# Altium PCB 最小系统板排针位置(1).PcbDoc
Units mm, origin at the board's own origin, x right, y up, seen from the top; angles counter-clockwise.
Board outline 80.1 x 50.12 mm, 2 copper layers (Top Layer, Bottom Layer); 8 components, 142 nets, 118 pads, 0 vias.
Unrouted connection lines stored in the file: 6.
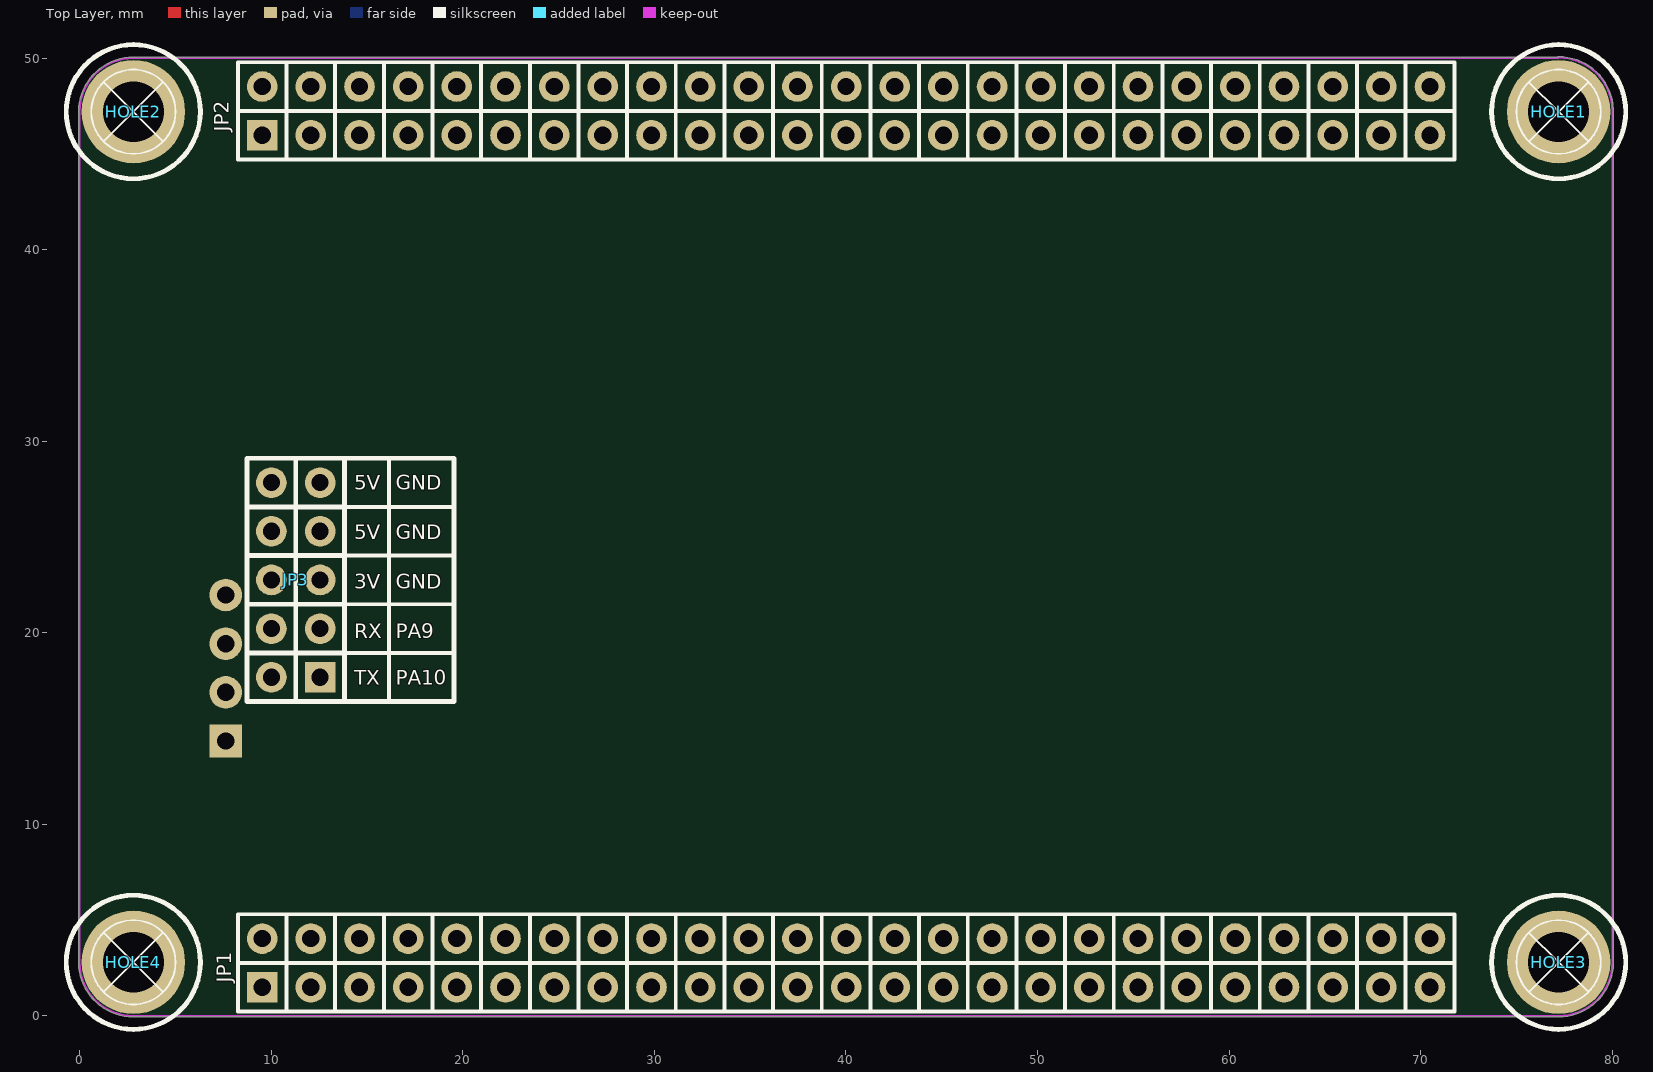
[diagram p0: Top Layer view]
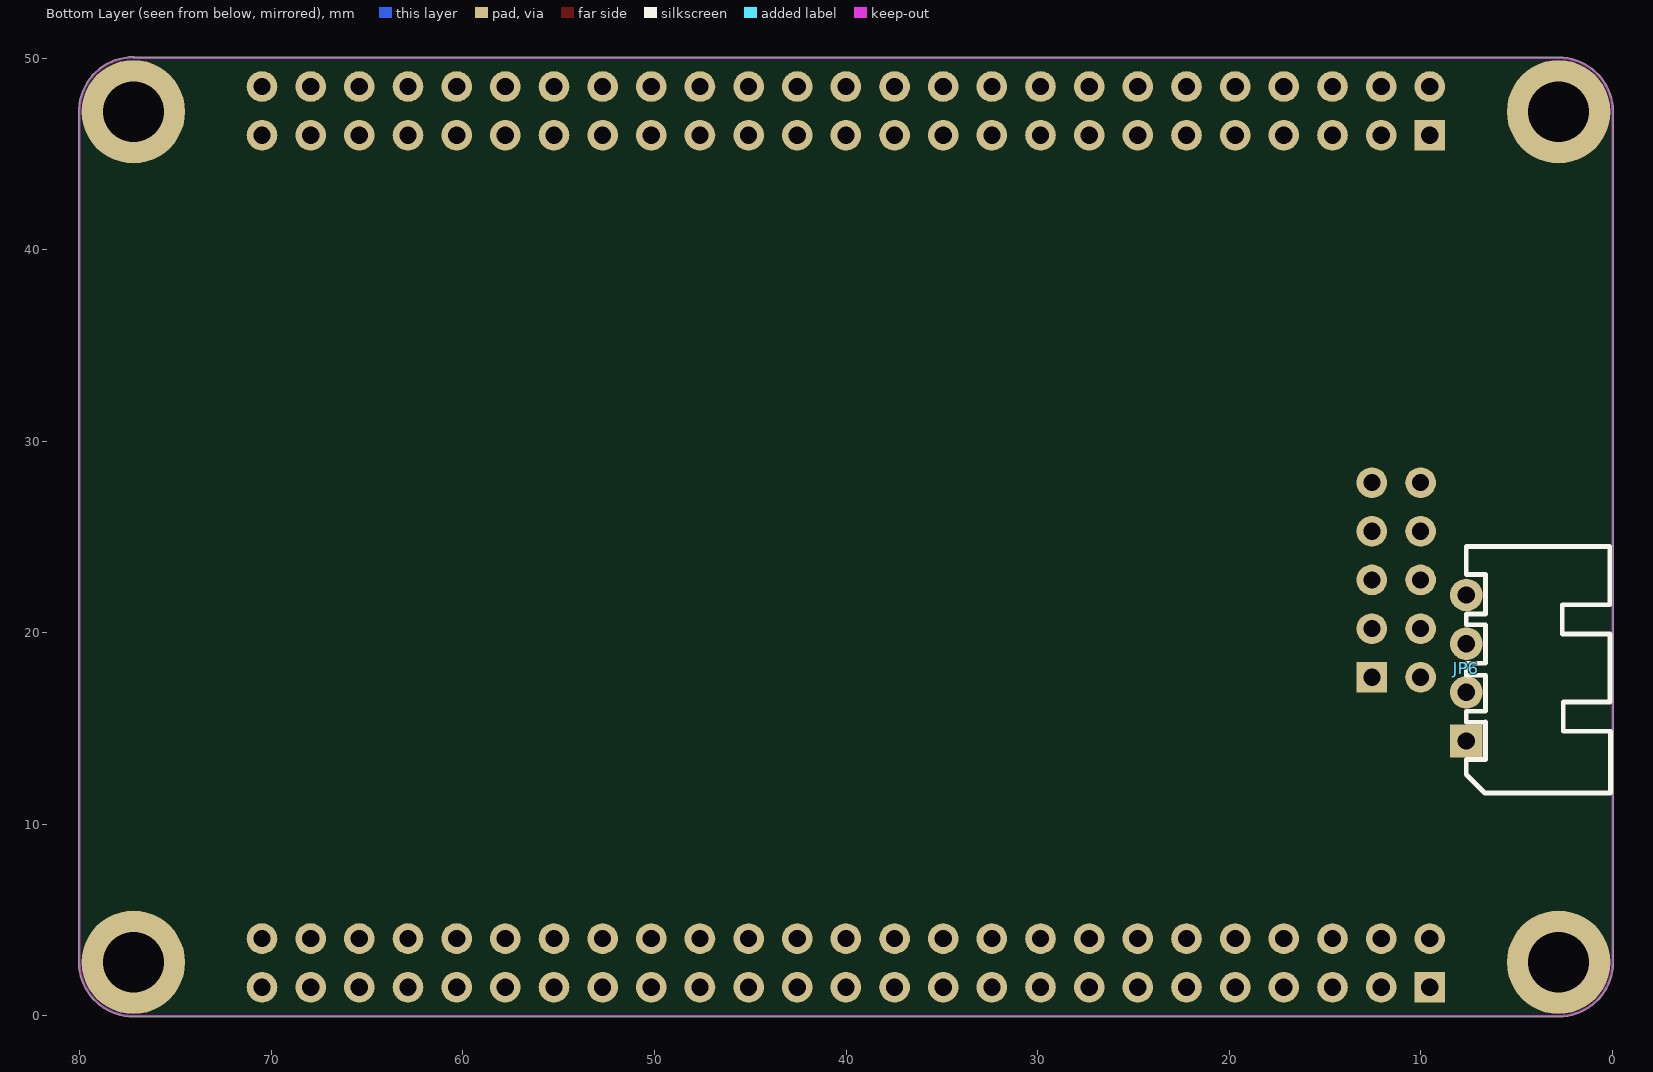
[diagram p1: Bottom Layer view, seen from below]

## Layer stack, top to bottom
Top Solder: solder mask 0.0102, Solder Resist, Dk 3.5
Top Layer: signal copper 0.0356
Dielectric 1: dielectric 0.32, FR-4, Dk 4.8
Bottom Layer: signal copper 0.0356
Bottom Solder: solder mask 0.0102, Solder Resist, Dk 3.5

## Board outline
-0.05,2.8 ccw(c2.8,2.8) 2.8,-0.05 77.2,-0.05 ccw(c77.2,2.8) 80.05,2.8 80.05,47.32 ccw(c80,47.32) 80.048,47.336 ccw(c77.2,47.219) 77.2,50.069 ccw(c77.2,50.019) 77.161,50.05 2.8,50.05 ccw(c2.8,47.2) -0.05,47.2

## Design rules (kind name [scope] priority, off if disabled: settings)
Clearance Clearance_FPC_Footprint [HasFootprint('FPC0.5 2H-WS-34P','FPC0.5 2H-WS-18P')] p1: gap=0.152 ignorepadtopadclearanceinfootprint=FALSE
Clearance Clearance_keepOut [OnLayer('Keep-Out Layer')] p2: gap=0 ignorepadtopadclearanceinfootprint=FALSE
Clearance [All] p3: gap=0.152 ignorepadtopadclearanceinfootprint=FALSE except(0.254: Arc-Poly Track-Poly SMDPad-Poly THPad-Poly Via-Poly Fill-Poly Poly-Poly)
ComponentClearance [All] p1: gap=0 collisioncheckmode=3 verticalgap=0 showdistances=FALSE
HoleSize [All] p1 off: absolutevalues=TRUE maxlimit=25.4 minlimit=0.025 maxpercent=80.000 minpercent=20.000
HoleToHoleClearance [All] p1: gap=0 allowstackedmicrovias=TRUE
MinimumSolderMaskSliver [All] p1: minsoldermaskwidth=0
NetAntennae [All] p1 off: netantennaetolerance=0
PolygonConnect PolygonConnect_hole [HasFootprint('M3 5.4MM','USB-MICRO_B','HDR2.54-LI-2X25P')] p1: connectstyle=Direct reliefconductorwidth=0.254 reliefentries=4 polygonreliefangle="90 Angle" airgapwidth=0.254
PolygonConnect PolygonConnect_power [InNet('USB_5V')] p2: connectstyle=Direct reliefconductorwidth=0.254 reliefentries=4 polygonreliefangle="90 Angle" airgapwidth=0.254
PolygonConnect [All] p3: thpad.connectstyle=Relief thpad.reliefconductorwidth=0.254 thpad.reliefentries=4 thpad.polygonreliefangle="90 Angle" thpad.airgapwidth=0.254 smdpad.connectstyle=Relief smdpad.reliefconductorwidth=0.254 smdpad.reliefentries=4 smdpad.polygonreliefangle="90 Angle" smdpad.airgapwidth=0.254 via.connectstyle=Direct via.reliefconductorwidth=0.254 via.reliefentries=4 via.polygonreliefangle="90 Angle" via.airgapwidth=0.254
RoutingVias [All] p1: holewidth=0.3 width=0.6 viastyle="Through Hole" minholewidth=0.3 minwidth=0.55 maxholewidth=12.7 maxwidth=25.4
SilkToSilkClearance [All] p1 off: silktosilkclearance=0
SilkToSolderMaskClearance [IsPad] p1 off: minsilkscreentomaskgap=0 clearancetoexposedcopper=TRUE
SolderMaskExpansion [All] p1: expansion=0.102
Width [All] p1: maxlimit=25.4 minlimit=0.152 preferedwidth=0.203 minimp=50.000000 maximp=50.000000 favimp=50.000000
23 further rules are at their usual default settings.

## Classes and differential pairs
component class DEVICE: HOLE1 HOLE2 HOLE3 HOLE4
component class CORE: JP1 JP2 JP6

## Components (designator, comment, footprint, x,y, rotation, side; value= is the part's Value field where it differs from the comment)
HOLE1 "M3" "M3 5.4MM" 77.2,47.2 r0 top
HOLE2 "M3" "M3 5.4MM" 2.8,47.2 r0 top
HOLE3 "M3" "M3 5.4MM" 77.2,2.8 r0 top
HOLE4 "M3" "M3 5.4MM" 2.8,2.8 r0 top
JP1 "Header 2X25" HDR2.54-LI-2X25P 33.655,2.769 r0 top
JP2 "Header 2X25" HDR2.54-LI-2X25P 33.655,47.244 r0 top
JP3 "Header 5X2" HDR2.54-LI-2x5P 11.278,22.758 r90 top
JP6 "SWD" XH2.54-WI-4P 7.62,18.161 r90 bottom

## Footprints (in the part's own frame and the unit in brackets; to place one, negate y for a bottom-side part, rotate by r counter-clockwise, add the part's x,y. Pads: shape width x height; smd on the part's side, far side on the other; paste and mask are expansions set on the pad)
HDR2.54-LI-2x5P [mm] "双排排针，5x2脚"
  rect 1.6x1.6 hole 0.9: 1(-5.08,-1.27)
  round 1.6 hole 0.9: 2(-5.08,1.27) 3(-2.54,-1.27) 4(-2.54,1.27) 5(0,-1.27) 6(0,1.27) 7(2.54,-1.27) 8(2.54,1.27) 9(5.08,-1.27) 10(5.08,1.27)
  silkscreen extent -6.35,-2.54 6.35,2.54, body extent -6.35,-2.54 6.35,2.54, height 8.5
HDR2.54-LI-2X25P [mm] "双排排针，25x2脚"
  rect 1.6x1.6 hole 0.9: 1(-24.13,-1.27)
  round 1.6 hole 0.9: 2(-24.13,1.27) 3(-21.59,-1.27) 4(-21.59,1.27) 5(-19.05,-1.27) 6(-19.05,1.27) 7(-16.51,-1.27) 8(-16.51,1.27) 9(-13.97,-1.27) 10(-13.97,1.27) 11(-11.43,-1.27) 12(-11.43,1.27) 13(-8.89,-1.27) 14(-8.89,1.27) 15(-6.35,-1.27) 16(-6.35,1.27) 17(-3.81,-1.27) 18(-3.81,1.27) 19(-1.27,-1.27) 20(-1.27,1.27) 21(1.27,-1.27) 22(1.27,1.27) 23(3.81,-1.27) 24(3.81,1.27) 25(6.35,-1.27) 26(6.35,1.27) 27(8.89,-1.27) 28(8.89,1.27) 29(11.43,-1.27) 30(11.43,1.27) 31(13.97,-1.27) 32(13.97,1.27) 33(16.51,-1.27) 34(16.51,1.27) 35(19.05,-1.27) 36(19.05,1.27) 37(21.59,-1.27) 38(21.59,1.27) 39(24.13,-1.27) 40(24.13,1.27) 41(26.67,-1.27) 42(26.67,1.27) 43(29.21,-1.27) 44(29.21,1.27) 45(31.75,-1.27) 46(31.75,1.27) 47(34.29,-1.27) 48(34.29,1.27) 49(36.83,-1.27) 50(36.83,1.27)
  silkscreen extent -25.4,-2.54 38.1,2.54, body extent -25.4,-2.54 38.1,2.54, height 8.5
"M3 5.4MM" [mm] "M3螺丝孔，"
  round 5.4 hole 3.175: 0(0,0)
  silkscreen extent -2.2,-2.2 2.2,2.2
XH2.54-WI-4P [mm] "接插件，4P"
  rect 1.7x1.7 hole 0.9: 1(-3.81,0)
  round 1.7 hole 0.9: 2(-1.27,0) 3(1.27,0) 4(3.81,0)
  silkscreen extent -6.53,-7.53 6.35,0, body extent -6.31,-7.35 6.31,0.35, height 5.73

## Part data
HOLE1 HOLE2 HOLE3 HOLE4: "铜柱孔", BOM名称=铜柱孔, 学习资源=www.ooocke.com, 版权归属=源创客
JP1 JP2: library part "Header 25X2", "25*2P接插件", BOM名称=20*2P接插件, 学习资源=www.ooocke.com, 版权归属=源创客
JP3: "5*2P接插件", BOM名称=5*2P接插件, 学习资源=www.ooocke.com, 版权归属=源创客
JP6: library part "Header 4", "4P接插件", BOM名称=4P接插件, 学习资源=www.ooocke.com, 版权归属=源创客

## Nets (pads, with @x,y where several pads share a name; then routed paths per layer and width w, separated by ;. In a path a pad name is that pad's centre, name@x,y a point inside that pad or via, vN(x,y) a via of type N, cw(c..) or ccw(c..) an arc to the next point about the centre after c; other vN are vias at no path point)
BEEP: JP2.18
BOOT0: 
BOOT1: JP1.17
CH340_D+: 
CH340_D-: 
F_CS: 
FIFO_OE: JP2.8
FIFO_RCLK: JP2.6
FIFO_RRST: JP2.9
FIFO_WEN: JP2.7
FIFO_WRST: JP2.22
FSMC_A0: JP1.44
FSMC_A1: JP1.41
FSMC_A2: 
FSMC_A3: JP1.30
FSMC_A4: JP1.27
FSMC_A5: JP1.28
FSMC_A6: JP1.50
FSMC_A7: JP1.47
FSMC_A8: JP1.48
FSMC_A9: JP1.45
FSMC_A10: 
FSMC_A11: 
FSMC_A12: 
FSMC_A13: 
FSMC_A14: 
FSMC_A15: 
FSMC_A16: JP1.23
FSMC_A17: JP1.26
FSMC_A18: JP1.25
FSMC_D0: JP1.46
FSMC_D1: JP1.43
FSMC_D2: JP2.27
FSMC_D3: JP2.26
FSMC_D4: JP1.38
FSMC_D5: JP1.35
FSMC_D6: JP1.36
FSMC_D7: JP1.32
FSMC_D8: JP1.29
FSMC_D9: JP1.31
FSMC_D10: JP1.34
FSMC_D11: JP1.33
FSMC_D12: JP1.37
FSMC_D13: JP1.40
FSMC_D14: JP1.39
FSMC_D15: JP1.42
FSMC_NBL0: JP2.16
FSMC_NBL1: JP2.15
FSMC_NE2: JP2.20
FSMC_NE3: 
FSMC_NE4: 
FSMC_NOE: JP2.24
FSMC_NWE: JP2.23
GND: HOLE1.0 HOLE2.0 HOLE3.0 HOLE4.0 JP1.1 JP2.2 JP2.4 JP3.5 JP3.7 JP3.9 JP6.4
IIC_SCL: 
IIC_SDA: 
LCD_BL: JP1.49
LED0: 
LED1: 
NetC4_1: 
NetC5_1: 
NetC6_2: 
NetC7_2: 
NetC40_2: 
NetD2_2: 
NetLED0_1: 
NetLED1_1: 
NetPWR_1: 
NetQ1_1: 
NetQ1_2: 
NetQ2_1: 
NetQ2_3: 
NetR5_2: 
NetR25_2: 
NetR26_2: 
OV_D0: JP2.33
OV_D1: JP2.32
OV_D2: JP2.31
OV_D3: JP2.30
OV_D4: JP1.16
OV_D5: JP1.15
OV_D6: JP2.47
OV_D7: JP2.46
OV_SCL: JP2.25
OV_SDA: JP2.10
OV_VSYNC: JP2.43
PA0: 
PA1: JP1.5
PA2: JP1.8
PA3: JP1.9
PA4: JP1.12
PA5: JP1.11
PA6: JP1.14
PA7: JP1.13
PA9: JP3.3
PA10: JP3.1
PA11: JP2.34
PA12: JP2.35
PA13: JP6.2
PA14: JP6.3
PA15: JP2.28
PB1: JP1.18
PB9: JP2.17
PB10: JP1.10
PB11: JP1.7
PB13: JP2.41
PB14: JP2.36
PB15: JP2.42
PC8: JP2.45
PC9: JP2.44
PC10: JP2.40
PC11: JP2.39
PC12: JP2.37
PC13: JP2.14
PD2: JP2.38
PD7: JP2.21
PE2: JP2.12
PE3: JP2.11
PE6: JP2.13
PF6: JP2.29
PF7: JP1.24
PF8: JP1.21
PF9: JP1.22
PF10: JP1.19
PF11: JP1.20
PG6: JP2.50
PG7: JP2.49
PG8: JP2.48
PG11: JP2.19
RESET: JP1.3
RXD: JP3.4
TXD: JP3.2
USB_5V: 
VBAT: JP2.5
VBAT_IN: 
VCC3.3: JP1.2 JP1.4 JP3.6 JP6.1
VCC5: JP2.1 JP2.3 JP3.8 JP3.10
VDDA: 
VREF: JP1.6
VREF+: 
VS1: 
VS2: 

## Keep-outs
Keep-Out Layer:
  lines w0.1: 77.2,50 2.8,50 ccw(c2.8,47.2) 0,47.2 0,2.8 ccw(c2.8,2.8) 2.8,0 77.2,0 ccw(c77.2,2.8) 80,2.8 80,47.32 ; 77.2,50.019 cw(c77.2,47.219) 80,47.219

## Silkscreen, mask and mechanical layers (free items; w line width, h text height)
Top Overlay:
  circle w0.254: c77.2,2.8 r3.5
  circle w0.254: c77.2,47.2 r3.5
  circle w0.254: c2.8,47.2 r3.5
  circle w0.254: c2.8,2.8 r3.5
  lines w0.203: 13.614,26.568 19.482,26.568 ; 13.818,18.948 19.533,18.948 ; 13.818,21.488 19.533,21.488 ; 13.818,24.028 19.507,24.028 ; 16.154,16.408 16.154,29.108
  lines w0.254: 13.665,29.108 19.533,29.108 19.533,16.408 13.741,16.408
  text "5V" at 14.326,27.457 h0.76
  text "GND" at 16.51,27.457 h0.76
  text "5V" at 14.326,24.879 h0.76
  text "GND" at 16.51,24.879 h0.76
  text "3V" at 14.326,22.301 h0.76
  text "GND" at 16.51,22.301 h0.76
  text "RX" at 14.326,19.723 h0.76
  text "PA9" at 16.51,19.723 h0.76
  text "TX" at 14.326,17.297 h0.76
  text "PA10" at 16.51,17.297 h0.76

## Dimensions
0,50 to 80,50 on Top Overlay
77.2,50 to 77.2,0 on Top Overlay
2.8,2.8 to 2.8,47.2 on Top Overlay
2.8,2.8 to 77.2,2.8 on Top Overlay